# EAGLE board SAMD11C14_Mini_Breakout (EAGLE 9.1.0)

Size 15.24 x 33.02 mm. Coordinates in mm from the lower left corner, seen from the top.
Outline: 0,0 15.24,0 15.24,33.02 0,33.02 0,0
Copper layers (1*16): Top 0.035mm / dielectric 1.5mm / Bottom 0.035mm
Design rules "default": minimum track width 6mil, minimum drill 0.35mm, track to track 6mil, track to pad 6mil, pad to pad 6mil, via to via 6mil, smd to smd 6mil, copper to edge 40mil, drill to drill 6mil, minimum pad ring 10mil, minimum via ring 8mil, stop-mask expansion 4mil, vias tented up to drill 0mil, thermal gap 10mil

## Footprints (pad centres in the part's own frame; a part is rotated, then mirrored left to right if it is on the bottom)
0603 = smd 1.1 x 1: 1 -0.85,0; 2 0.85,0
0805 = smd 0.8 x 1.2: 1 -0.9,0; 2 0.9,0
SOD-323 = smd 0.63 x 0.83: A 1.15,0; C -1.15,0
LED-0603 = smd 1 x 1: A -0.877,0; C 0.877,0
PTC-1206 = smd 1 x 1.8: 1 -1.4,0; 2 1.4,0
FIDUCIAL-1X2 = smd 1 x 1: 1 0,0
STAND-OFF = hole 3.302: 0,0
USB-MICROB-PTH-MILL = smd 0.4 x 1.75: D+ 0,0; D- -0.65,0; GND 1.3,0; ID 0.65,0; VBUS -1.3,0 | smd 2 x 1.46: SHIELD -2.9,0.275; SHIELD2 2.9,0.275 | smd 1.425 x 2.5: SHIELD3 -0.963,-2.675; SHIELD4 0.963,-2.675 | smd 1.4 x 2.1 bottom: SHIELD5 -2.731,-2.531; SHIELD7 2.729,-2.531 | smd 1 x 1: SHIELD6 2.7,-2.575 | smd 1.1 x 1.5: SHIELD8 -2.731,-2.731 | smd 1 x 1.3 bottom: SHIELD9 -2.43,0.195; SHIELD10 2.43,0.195
1X07_NO_SILK = drill 1.016 pad 1.88: 1 0,0; 2 2.54,0; 3 5.08,0; 4 7.62,0; 5 10.16,0; 6 12.7,0; 7 15.24,0
2X5-PTH-1.27MM = drill 0.508 pad 1: 1 -2.54,-0.635; 2 -2.54,0.635; 3 -1.27,-0.635; 4 -1.27,0.635; 5 0,-0.635; 6 0,0.635; 7 1.27,-0.635; 8 1.27,0.635; 9 2.54,-0.635; 10 2.54,0.635
TACTILE_SWITCH_SMD_4.6X2.8MM = smd 0.9 x 1: 1 -2.05,-0.8; 2 2.05,-0.8; 3 2.05,0.8; 4 -2.05,0.8
SOIC-14 = smd 0.6 x 1.5: 1 -3.81,-2.7; 2 -2.54,-2.7; 3 -1.27,-2.7; 4 0,-2.7; 5 1.27,-2.7; 6 2.54,-2.7; 7 3.81,-2.7; 8 3.81,2.7; 9 2.54,2.7; 10 1.27,2.7; 11 0,2.7; 12 -1.27,2.7; 13 -2.54,2.7; 14 -3.81,2.7
SOT23-5 = smd 0.55 x 1.2: 1 -0.95,-1.3; 2 0,-1.3; 3 0.95,-1.3; 4 0.95,1.3; 5 -0.95,1.3

## Placement (x,y rotation side)
C1  0.1uF  [0603]  11.68,14.73 270 top
C2  1.0uF  [0805]  5.84,22.35 270 top
C3  2.2uF  [0603]  11.68,18.29 270 top
D1  1A/23V/620mV  [SOD-323]  5.08,25.65 0 top
D2  1A/23V/620mV  [SOD-323]  3.81,22.35 270 top
D3  BLUE  [LED-0603]  2.03,29.72 90 top
D4  RED  [LED-0603]  13.21,29.72 90 top
F1  500mA  [PTC-1206]  9.4,25.65 180 top
FD1  FIDUCIAL1X2  [FIDUCIAL-1X2]  21.59,34.29 0 top  (outside the outline)
FD2  FIDUCIAL1X2  [FIDUCIAL-1X2]  19.05,34.29 0 top  (outside the outline)
FRAME1  FRAME-LETTER  [CREATIVE_COMMONS]  -96.52,-7.62 0 top  (outside the outline)
FRAME2  FRAME-LETTER  [CREATIVE_COMMONS]  -96.52,1.27 0 top  (outside the outline)
H3  STAND-OFF  [STAND-OFF]  2.54,2.54 0 top
H4  STAND-OFF  [STAND-OFF]  12.7,2.54 0 top
J1  USB  [USB-MICROB-PTH-MILL]  7.62,27.94 180 top
J2  [1X07_NO_SILK]  1.27,7.62 90 top
J3  [1X07_NO_SILK]  13.97,22.86 270 top
JP1  CORTEX_DEBUGPTH  [2X5-PTH-1.27MM]  6.6,8.64 0 top
LOGO1  OSHW-LOGOS  [OSHW-LOGO-S]  -50.8,29.21 0 top  (outside the outline)
LOGO2  SFE_LOGO_NAME_FLAME.1_INCH  [SFE_LOGO_NAME_FLAME_.1]  -63.5,10.16 0 top  (outside the outline)
LOGO3  SFE_LOGO_FLAME.1_INCH  [SFE_LOGO_FLAME_.1]  -80.01,17.78 0 top  (outside the outline)
R1  10k  [0603]  11.68,11.18 90 top
R2  330  [0603]  2.03,26.16 270 top
R3  330  [0603]  13.21,26.16 270 top
S1  RESET  [TACTILE_SWITCH_SMD_4.6X2.8MM]  7.62,3.56 270 top
U1  ATSAMD11C14  [SOIC-14]  6.6,15.49 270 top
U2  3.3V  [SOT23-5]  9.4,22.35 270 top

## Library data of the parts
C1 = SparkFun-Capacitors; PROD_ID: CAP-00810
C2 = SparkFun-Capacitors; PROD_ID: CAP-11625
C3 = SparkFun-Capacitors; PROD_ID: CAP-07888
D1 D2 = SparkFun-DiscreteSemi; PROD_ID: DIO-11623
D3 = SparkFun-LED; PROD_ID: DIO-08575
D4 = SparkFun-LED; PROD_ID: DIO-00819
F1 = SparkFun-PowerIC; PROD_ID: RES-11150
FD1 FD2 FRAME1 FRAME2 LOGO1-LOGO3 = SparkFun-Aesthetics
H3 H4 = SparkFun-Hardware
J1 = SparkFun-Connectors; PROD_ID: CONN-13711
J2 J3 = SparkFun-Connectors
JP1 = samd21-temp
R1 = SparkFun-Resistors; PROD_ID: RES-00824
R2 R3 = SparkFun-Resistors; PROD_ID: RES-00818
S1 = SparkFun-Switches; PROD_ID: SWCH-13065
U1 = SAMD11C14_Mini_Breakout
U2 = SparkFun-PowerIC; PROD_ID: VREG-12457

## Nets
3.3V: C1.1 C3.1 J3.2 JP1.1 R1.2 R3.2 U1.12 U2.5
!RESET: J2.1 JP1.10 R1.1 S1.3 S1.4 U1.6
A2: J3.3 U1.13
A4: J3.4 U1.14
A5: J3.5 R2.2 U1.1
A14: J3.6 U1.4
A15: J3.7 U1.5
D8: J2.5 U1.2
D9: J2.4 U1.3
D30: J2.3 JP1.4 U1.7
D31: J2.2 JP1.2 U1.8
GND: C1.2 C2.2 C3.2 D3.C D4.C J1.GND J2.6 JP1.3 JP1.5 S1.1 S1.2 U1.11 U2.2
N$1: D3.A R2.1
N$2: D4.A R3.1
N$4: F1.1 J1.VBUS
USB_D+: J1.D+ U1.10
USB_D-: J1.D- U1.9
V_BATT: D2.A J2.7
V_USB: D1.A F1.2 J3.1
VIN: C2.1 D1.C D2.C U2.1 U2.3

## Tracks (layer width: path | path; a pad name or v marks a point on that pad's centre or on a via)
3.3V  (7 unrouted)
!RESET  (5 unrouted)
A2  (1 unrouted)
A4  (1 unrouted)
A5  (2 unrouted)
A14  (1 unrouted)
A15  (1 unrouted)
D8  (1 unrouted)
D9  (1 unrouted)
D30  (2 unrouted)
D31  (2 unrouted)
GND  (12 unrouted)
N$1  (1 unrouted)
N$2  (1 unrouted)
N$4  (1 unrouted)
USB_D+  (1 unrouted)
USB_D-  (1 unrouted)
V_BATT  (1 unrouted)
V_USB  (2 unrouted)
VIN  (4 unrouted)